# Allegro board 08_047456d.brd
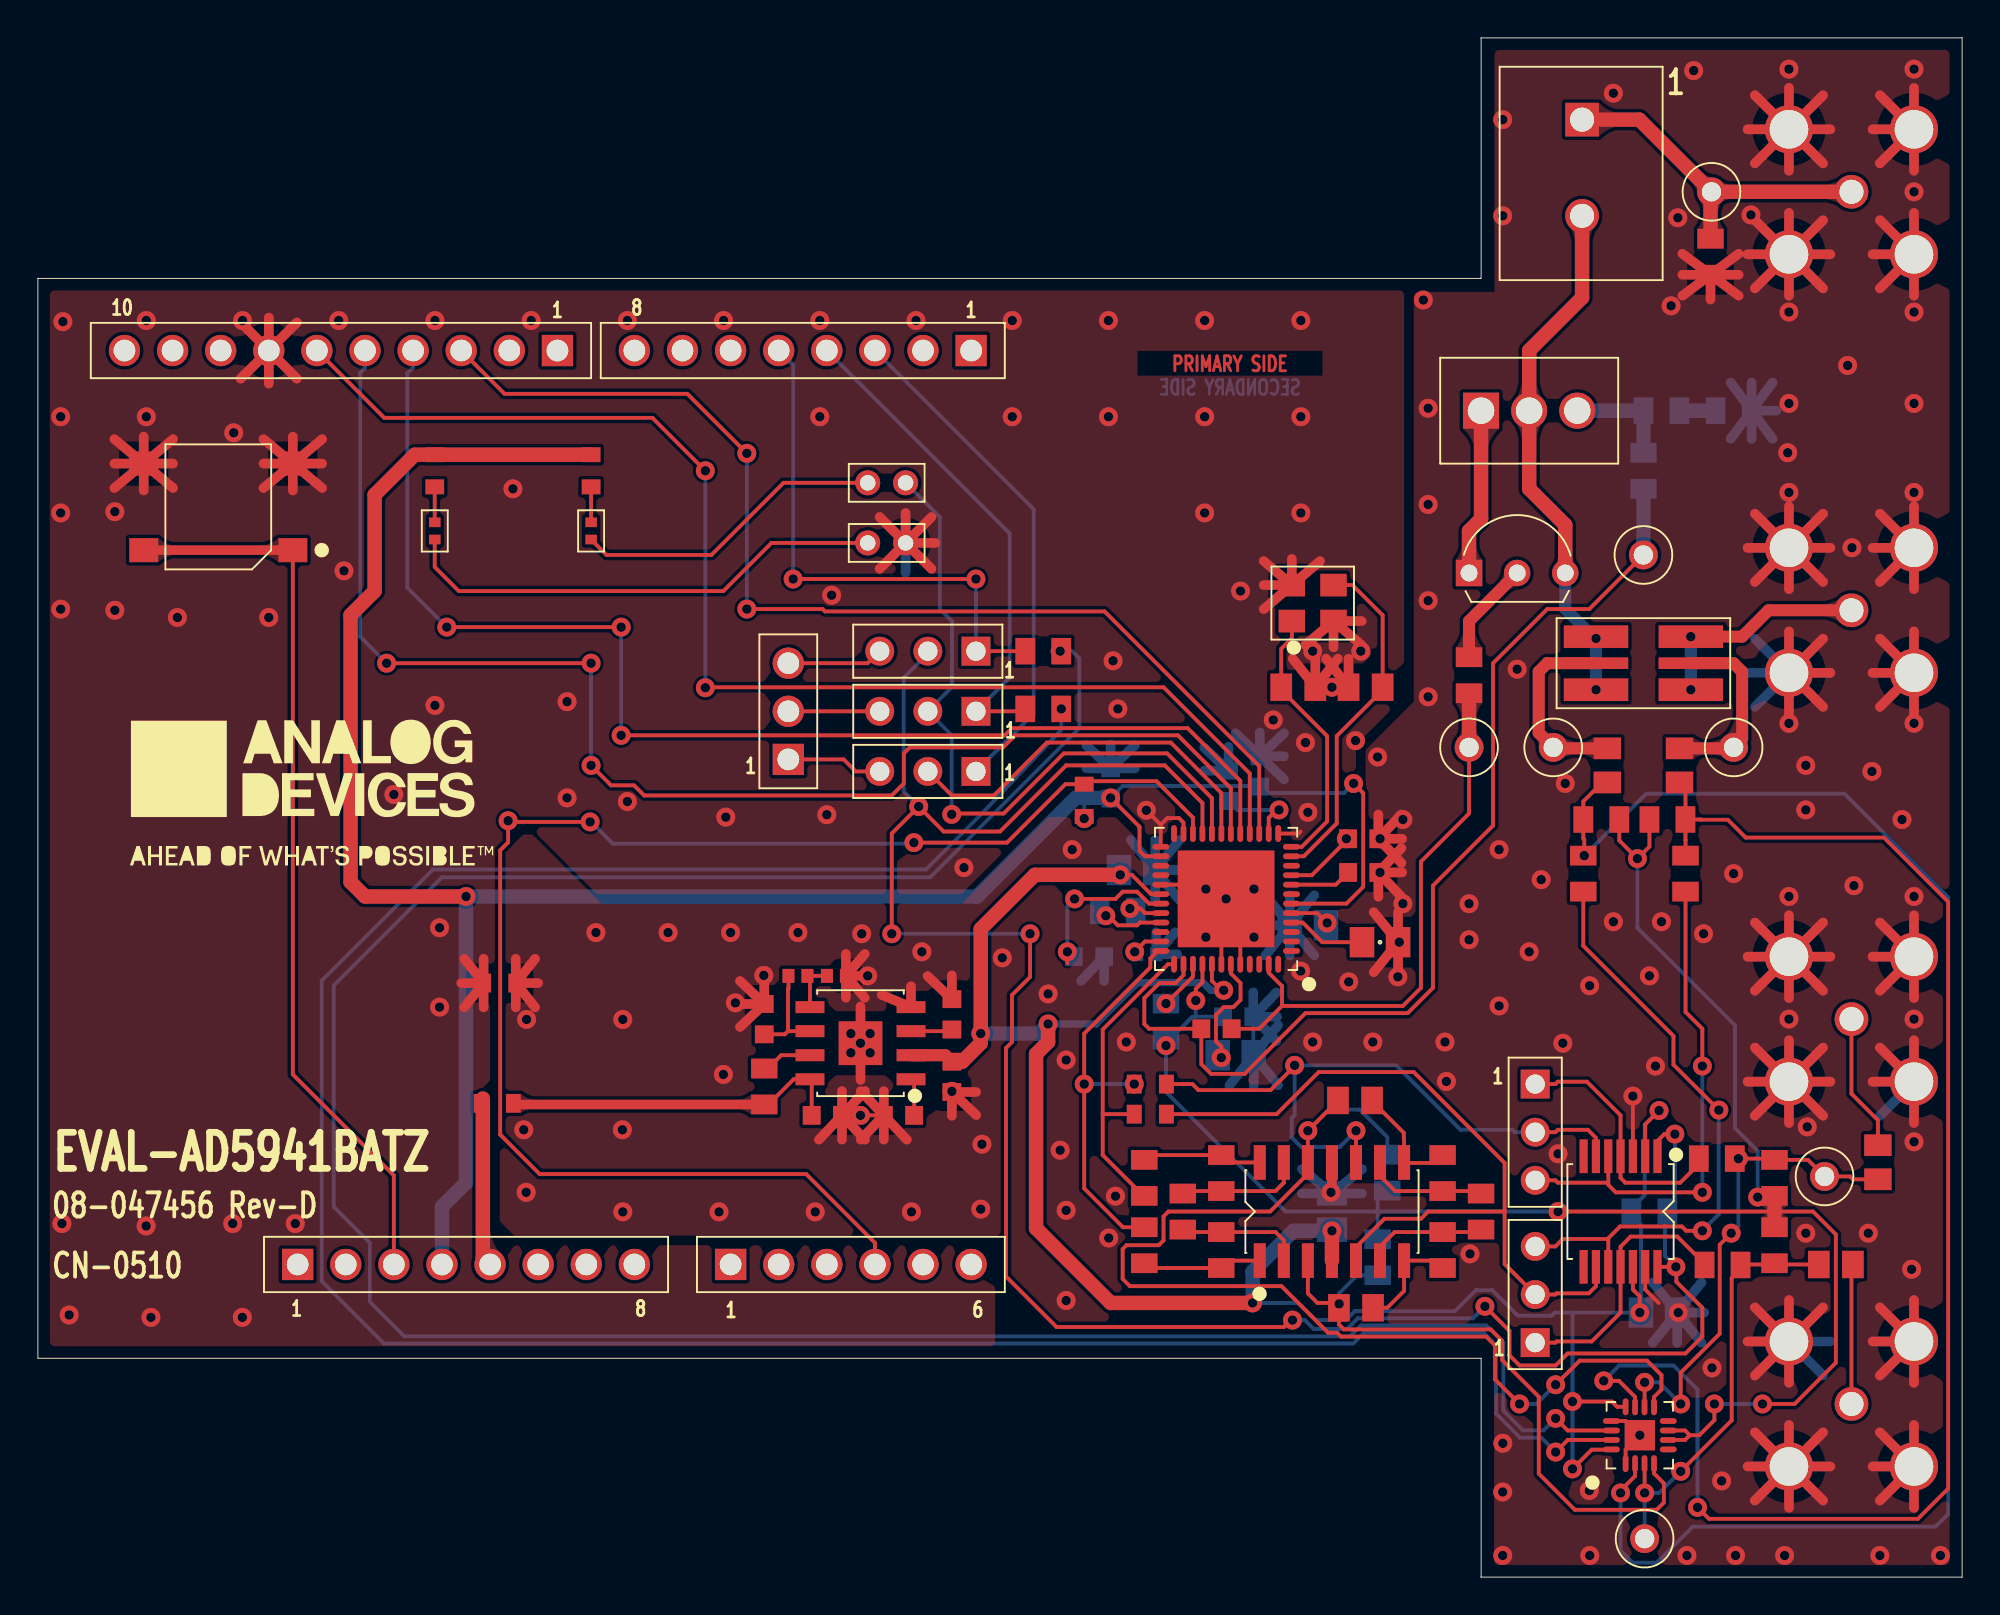
[diagram p0: board, top side]
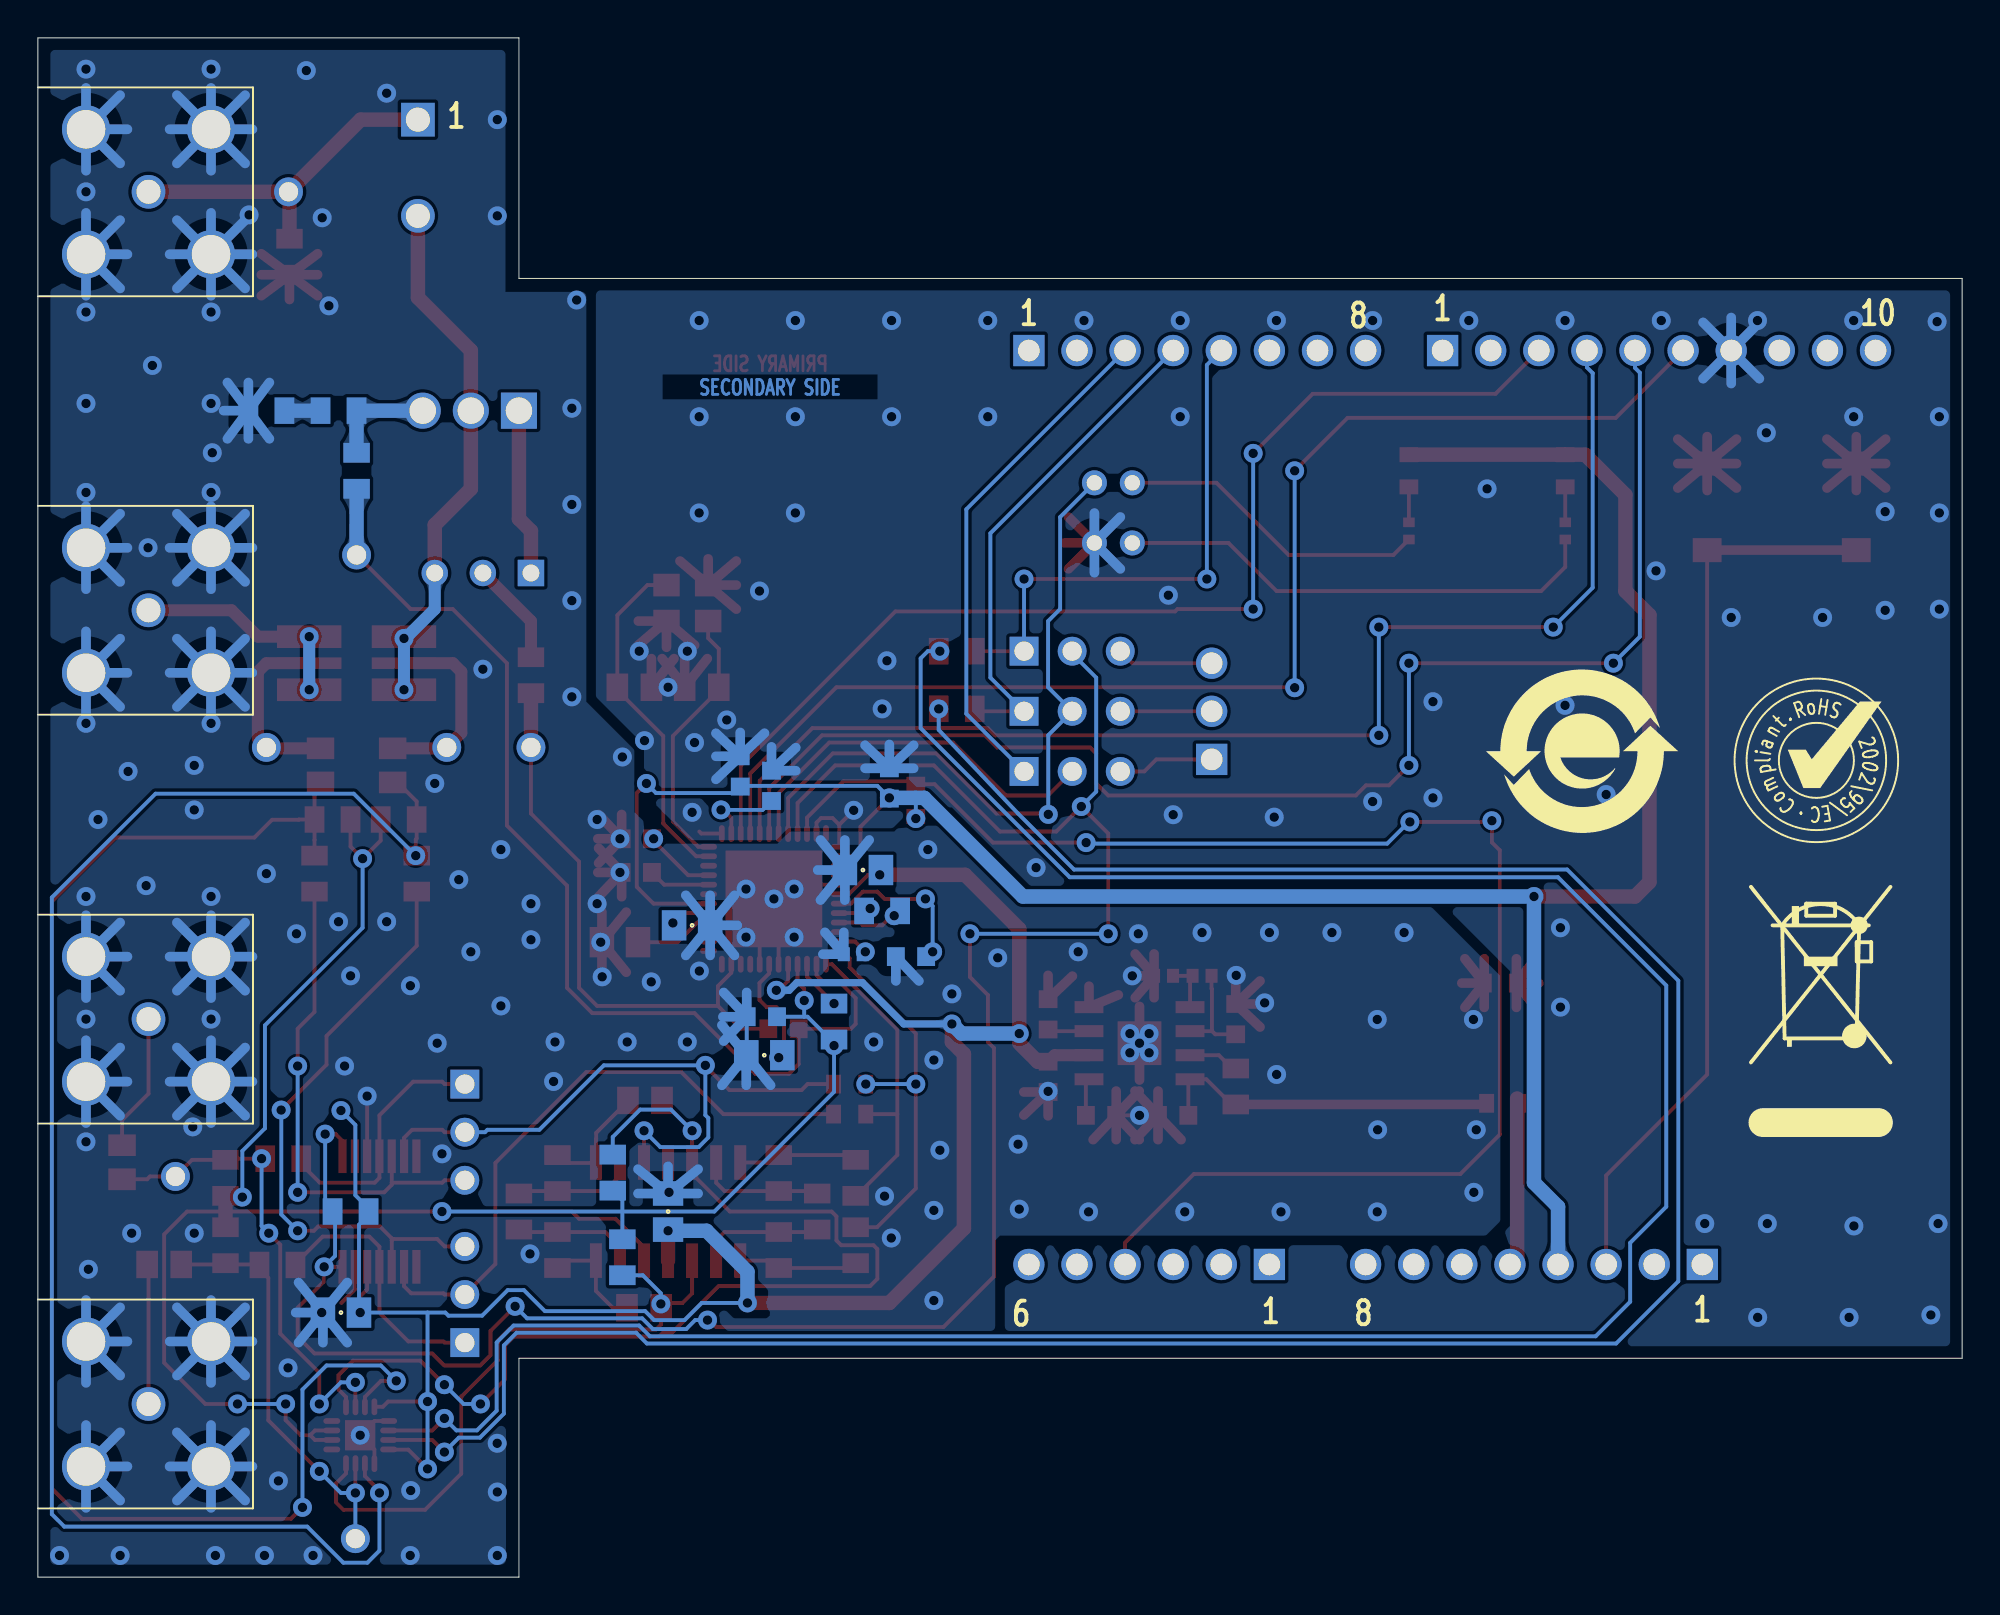
[diagram p1: board, bottom side, seen from below]

Outline 101.6 x 81.28 mm; copper layers: TOP, BOTTOM. Coordinates in mm from the lower left corner of the outline.
Outline path: 0,68.58 0,11.56 76.2,11.56 76.2,0 101.6,0 101.6,81.28 76.2,81.28 76.2,68.58 0,68.58

## Design rules (mm)
constraint set DEFAULT: min track width 0.203

## Placement (name value [footprint] x y rotation side)
A2  AD8694ARZ  [SO14NB-2]  68.33 19.3 0 top
AIN1  YEL  [CNKEY5001TP]  84.77 53.97 0 top
C5  2.2uF  [C0805]  69.6 14.22 180 top
C6  2.2uF  [C0805]  69.55 25.17 180 top
C7  10uF  [C0805H60]  68.33 19.3 90 bottom
C8  100PF  [C0603]  62.23 28.96 0 top
C9  1UF  [C0603]  63.37 29.59 180 bottom
C10  1UF  [C0603]  55.5 32.77 180 bottom
C11  1UF  [C0603]  69.98 38.99 180 top
C12  10uF  [C0805H60]  63.25 27.56 0 bottom
C13  1UF  [C0603]  69.98 37.21 180 top
C14  10uF  [C0805H60]  70.87 33.53 0 top
C15  10uF  [C0805H60]  85.6 13.97 0 bottom
C16  10uF  [C0805H60]  58.04 37.34 0 bottom
C17  10uF  [C0805H60]  67.06 34.42 0 bottom
C20  1UF  [C0603]  62.87 41.78 90 bottom
C21  6.8pF  [C0805]  66.55 46.99 0 top
C22  6.8pF  [C0805]  70.1 46.99 180 top
C25  10UF  [C0603]  41.66 24.38 0 top
C26  1UF  [C0603]  48.26 29.72 90 top
C27  10UF  [C0603]  45.47 24.38 180 top
C28  1UF  [C0603]  38.35 29.46 90 top
C29  10UF  [C0603]  48.26 26.42 270 top
C30  1UF  [C0603]  56.64 41.91 270 bottom
C32  1UF  [C0603]  64.52 42.55 270 bottom
C36  2.2uF  [C0805]  97.16 21.91 270 top
C37  2.2uF  [C0805]  82.87 42.86 270 top
C38  2.2uF  [C0805]  86.68 42.86 270 top
C39  2.2uF  [C0805]  94.93 16.51 180 top
CE0  YEL  [CNKEY5001TP]  75.56 43.81 0 top
EXC_P  YEL  [CNKEY5001TP]  80.01 43.81 0 top
F+  112809-75  [CNBNCRAL1098W550H474]  95.76 51.05 0 bottom
F-  112809-75  [CNBNCRAL1098W550H474]  95.76 73.15 0 bottom
GP1  SML-P11VTT86  [LED0402]  29.21 55.25 90 top
JP1  22-03-2031  [CNHDR1X3H530]  79.06 26.04 270 top
JP2  22-03-2031  [CNHDR1X3H530]  79.06 12.38 90 top
JP3  0  [R0805]  59.56 29.34 90 bottom
JP7  22-03-2031  [CNHDR1X3H530]  49.53 42.55 180 top
JP8  22-03-2031  [CNHDR1X3H530]  49.53 45.72 180 top
JP9  22-03-2031  [CNHDR1X3H530]  49.53 48.89 180 top
NOREF  -  []  13.72 16.51 0 top
NOREF#2  -  []  101.6 0 0 top
NOREF#3  -  []  0 11.56 0 top
NOREF#4  -  []  76.2 0 0 top
NOREF#5  -  []  0 11.56 0 top
NOREF#6  -  []  0 68.58 0 top
NOREF#7  -  []  0 68.58 0 top
NOREF#8  -  []  0 11.56 0 top
NOREF#9  -  []  126.36 122.56 0 top
NOREF#10  -  []  -2.54 294.64 0 top
NOREF#11  -  []  23.5 360.68 0 top
NOREF#12  -  []  101.6 0 90 top
NOREF#13  -  []  131.44 31.75 0 top
NOREF#14  -  []  101.6 81.28 180 top
NOREF#15  -  []  49.17 96.62 0 top
NOREF#16  -  []  135.2 -6.35 0 top
NOREF#17  -  []  135.15 16.51 0 top
NOREF#18  -  []  101.6 0 90 top
NOREF#19  -  []  76.2 0 0 top
NOREF#20  -  []  13.72 16.51 0 top
NOREF#21  -  []  0 68.58 270 top
NOREF#22  -  []  14.48 41.4 0 top
NOREF#23  -  []  -48.9 -43.18 0 top
NOREF#24  -  []  76.2 81.28 270 top
NOREF#25  -  []  20.07 43.61 180 bottom
NOREF#26  -  []  -1.8 40.13 180 bottom
NOREF#27  -  []  7.7 43.13 180 bottom
P1  M22-2010205  [CNHDR1X2H207]  43.81 54.61 0 top
P2  SSQ-106-03-G-S  [CNSAMTECSSQ-106-XX-X-S]  36.58 16.51 0 top
P3  SSQ-108-03-G-S  [CNSAMTECSSQ-108-XX-X-S]  13.72 16.51 0 top
P4  M20-9990345  [CNHDR1X3H340]  39.62 43.18 90 top
P5  SSQ-110-03-G-S  [CNSAMTECSSQ-110-XX-X-S]  27.43 64.77 180 top
P6  SSQ-108-03-G-S  [CNSAMTECSSQ-108-XX-X-S]  49.28 64.77 180 top
P7  EDZ250/2  [CNTH1X2H394]  81.53 76.96 270 top
P8  M22-2010205  [CNHDR1X2H207]  43.81 57.78 0 top
PWR  SML-P11MTT86RR  [LED0402]  20.95 55.25 90 top
Q1  2N3904TF  [TO92V2]  75.56 53.02 0 top
Q2  TIP31BG  [TO220]  78.74 61.59 0 top
R1  560  [R0603]  20.95 58.42 270 top
R2  2MEG  [R0805]  91.69 17.53 90 top
R3  2MEG  [R0805]  91.69 21.08 90 top
R4  2MEG  [R0805]  82.55 40 0 top
R5  2MEG  [R0805]  86.04 40 0 top
R6  1K  [R0805]  81.6 37.15 270 top
R7  1K  [R0805]  87 37.15 270 top
R8  1K  [R0805]  88.95 16.48 180 top
R9  1K  [R0805]  88.65 22.1 180 top
R10  10K  [R0805]  38.35 25.91 90 top
R11  10K  [R0603]  55.24 41.02 270 top
R12  1K  [R0805]  76.2 19.3 90 top
R13  10K  [R0805]  74.17 17.27 270 top
R14  10K  [R0805]  74.17 21.34 90 top
R15  17.4K  [R0402]  40.13 31.75 0 top
R16  10K  [R0402]  42.16 31.75 0 top
R17  0  [R0805]  58.42 17.53 90 top
R18  2MEG  [R0805]  70.74 16.89 90 bottom
R19  2MEG  [R0805]  71.25 21.36 90 bottom
R20  0  [R0805]  58.42 21.08 270 top
R21  62  [R0805]  85.72 61.59 0 bottom
R22  0  [R0805]  89.53 61.59 0 bottom
R25  51  [R0805]  75.56 47.62 270 top
R26  470  [R0805]  84.77 58.42 270 bottom
R27  1K  [R0805]  60.45 19.3 90 top
R28  10K  [R0805]  62.48 17.27 270 top
R29  10K  [R0805]  62.48 21.34 90 top
R32  0  [R0805]  88.32 69.72 270 top
R33  10K  [R0805]  85.09 19.3 0 bottom
R34  0  [R0402]  58.55 32.89 180 bottom
R35  0  [R0603]  58.74 24.45 180 top
R36  1K  [R0805]  57.02 35.18 0 bottom
R37  0  [R0603]  58.74 26.04 180 top
R38  0  [R0805]  53.09 45.85 0 top
R39  0  [R0805]  53.09 48.89 0 top
R40  0  [R0603]  24.26 25.02 180 top
R41  0  [R0603]  24.38 31.37 180 top
R42  560  [R0603]  29.21 58.42 270 top
RCAL  0.005  [R2512_6P_RSENSE]  84.77 48.26 180 top
RESET  B3S-1000  [SWB3S1000]  9.53 56.52 0 top
S+  112809-75  [CNBNCRAL1098W550H474]  95.76 9.14 0 bottom
S-  112809-75  [CNBNCRAL1098W550H474]  95.76 29.46 0 bottom
SNS_N  YEL  [CNKEY5001TP]  94.34 21.16 0 top
SNS_P  YEL  [CNKEY5001TP]  84.84 2.03 0 top
TP1  YEL  [CNKEY5001TP]  89.53 43.81 0 top
TP3  YEL  [CNKEY5001TP]  88.37 73.15 0 top
U1  AD5941BCPZ  [QFN48_7X7_PAD5_1X5_1]  62.74 35.81 90 top
U2  ADG636YRUZ  [TSSOP14]  83.57 19.3 180 top
U3  ADM7155ARDZ-04  [SO8NB-PAD2_3X2_3]  43.43 28.19 90 top
U4  ADG1609BCPZ  [QFN16_3X3_PAD1_6X1_6]  84.58 7.49 0 top
Y1  16MEGHZ  [YSML126W98H31]  67.31 51.44 0 top

## Library data of the parts
A2 = AD8694_V2: Tolerance: N/A; User Part Number: UPN; alternate symbols: (); part number: AD8694_V2_SM-AD8694ARZ,E017939,SO14NB-2; tolerance: N/A
AIN1 CE0 EXC_P SNS_N SNS_P TP1 TP3 = CNTP1P: Tolerance: N/A; User Part Number: UPN; alternate symbols: (); part number: CNTP1P_TH-YEL,E016321,CNKEY5001TP; tolerance: N/A
C5 C6 C36-C39 = CAP: User Part Number: UPN; Tolerance: 10; alternate symbols: (); part number: CAP_SM-2.2UF,10V,10,E010425,C0805; tolerance: 10
C7 C12 C14-C17 = CAP: Tolerance: 10; User Part Number: UPN; alternate symbols: (); part number: CAP_SM-10UF,25V,10,E014704,C0805H60; tolerance: 10
C8 = CAP: User Part Number: UPN; Tolerance: 5; alternate symbols: (); part number: CAP_SM-100PF,50V,5,E000415,C0603; tolerance: 5
C9-C11 C13 C20 C30 C32 = CAP: User Part Number: UPN; Tolerance: 10; alternate symbols: (); part number: CAP_SM-1UF,10V,10,E024444,C0603; tolerance: 10
C21 C22 = CAP: User Part Number: UPN; Tolerance: 0.25pF; alternate symbols: (); part number: CAP_SM-6.8PF,50V,0.25PF,E018426,C0805; tolerance: 0.25pF
C25 C27 C29 = CAP: User Part Number: UPN; Tolerance: 20; alternate symbols: (); part number: CAP_SM-10UF,35V,20,E026762,C0603; tolerance: 20
C26 C28 = CAP: User Part Number: UPN; Tolerance: 10; alternate symbols: (); part number: CAP_SM-1UF,25V,10,E025743,C0603; tolerance: 10
F+ F- S+ S- = CNBNC5P: User Part Number: UPN; Tolerance: N/A; alternate symbols: (); part number: CNBNC5P_TH-112809-75,E023533,CNBNCRAL1098W550H474; tolerance: N/A
GP1 = DIOLED: User Part Number: UPN; Tolerance: N/A; alternate symbols: (); part number: DIOLED_SM-SML-P11VTT86,N/A,N/A,E019415,LED0402; tolerance: N/A
JP1 JP2 JP7-JP9 = CN3P_JMPRSHRT: User Part Number: UPN; Tolerance: N/A; alternate symbols: (CNHDR1X3H530_ALT); part number: CN3P_JMPRSHRT_TH-22-03-2031,E021002,CNHDR1X3H530; tolerance: N/A
JP3 = RESJMPRSHRT: User Part Number: UPN; Tolerance: N/A; alternate symbols: (); part number: RESJMPRSHRT_SM-0,E028415,1/2W,N/A,R0805; tolerance: N/A
P1 P8 = CN2P: User Part Number: UPN; Tolerance: N/A; alternate symbols: (); part number: CN2P_TH-M22-2010205,E023091,CNHDR1X2H207; tolerance: N/A
P2 = CN6P: User Part Number: UPN; Tolerance: N/A; alternate symbols: (); part number: CN6P_TH-SSQ-106-03-G-S,E020477,CNSAMTECSSQ-106-XX-X-S; tolerance: N/A
P3 P6 = CN8P_A: User Part Number: UPN; Tolerance: N/A; alternate symbols: (); part number: CN8P_A_TH-SSQ-108-03-G-S,E020478,CNSAMTECSSQ-108-XX-X-S; tolerance: N/A
P4 = CN3P: Tolerance: N/A; User Part Number: UPN; alternate symbols: (); part number: CN3P_TH-M20-9990345,E017614,CNHDR1X3H340; tolerance: N/A
P5 = CN10P: User Part Number: UPN; Tolerance: N/A; alternate symbols: (); part number: CN10P_TH-SSQ-110-03-G-S,E020479,CNSAMTECSSQ-110-XX-X-S; tolerance: N/A
P7 = CN2P: User Part Number: UPN; Tolerance: N/A; alternate symbols: (); part number: CN2P_TH-EDZ250/2,E013453,CNTH1X2H394; tolerance: N/A
PWR = DIOLED: User Part Number: UPN; Tolerance: N/A; alternate symbols: (); part number: DIOLED_SM-SML-P11MTT86R,N/A,N/A,E014445,LED0402; tolerance: N/A
Q1 = TRAN2N3904: User Part Number: UPN; Tolerance: N/A; alternate symbols: (); part number: TRAN2N3904_TH-2N3904TF,E017741,TO92V2; tolerance: N/A
Q2 = TRANTIP31B: User Part Number: UPN; Tolerance: N/A; alternate symbols: (); part number: TRANTIP31B_TH-TIP31BG,E005562,TO220; tolerance: N/A
R1 R42 = RES: User Part Number: UPN; Tolerance: 1; alternate symbols: (); part number: RES_SM-560,E004245,1/16W,1,R0603; tolerance: 1
R2-R5 R18 R19 = RES: User Part Number: UPN; Tolerance: 0.1; alternate symbols: (R0805L); part number: RES_SM-2MEG,E030617,1/10W,0.1,R0805; tolerance: 0.1
R6-R9 R36 = RES: User Part Number: UPN; Tolerance: 1; alternate symbols: (R0805L); part number: RES_SM-1K,E003415,1/8W,1,R0805; tolerance: 1
R10 R33 = RES: User Part Number: UPN; Tolerance: 1; alternate symbols: (R0805L); part number: RES_SM-10K,E003254,1/8W,1,R0805; tolerance: 1
R11 = RES: User Part Number: UPN; Tolerance: 1; alternate symbols: (R0603L); part number: RES_SM-10K,E017856,1/16W,1,R0603; tolerance: 1
R12 R27 = RES: User Part Number: UPN; Tolerance: 0.1; alternate symbols: (R0805_0603_TH200LD25); part number: RES_SM-1K,E003811,1/8W,0.1,R0805; tolerance: 0.1
R13 R14 R28 R29 = RES: User Part Number: UPN; Tolerance: 0.1; alternate symbols: (R0805L); part number: RES_SM-10K,E003806,1/8W,0.1,R0805; tolerance: 0.1
R15 = RES: User Part Number: UPN; Tolerance: 1; alternate symbols: (R0402L); part number: RES_SM-17.4K,E014042,1/16W,1,R0402; tolerance: 1
R16 = RES: User Part Number: UPN; Tolerance: 5; alternate symbols: (); part number: RES_SM-10K,E019640,1/16W,5,R0402; tolerance: 5
R17 R20 R22 R32 R38 R39 = RES: User Part Number: UPN; Tolerance: N/A; alternate symbols: (R0805L); part number: RES_SM-0,E004152,1/10W,N/A,R0805; tolerance: N/A
R21 = RES: User Part Number: UPN; Tolerance: 5; alternate symbols: (R0805L); part number: RES_SM-62,E004198,1/10W,5,R0805; tolerance: 5
R25 = RES: User Part Number: UPN; Tolerance: 1; alternate symbols: (R0805L); part number: RES_SM-51,E014707,1/8W,1,R0805; tolerance: 1
R26 = RES: User Part Number: UPN; Tolerance: 1; alternate symbols: (R0805L); part number: RES_SM-470,E023447,1/3W,1,R0805; tolerance: 1
R34 = RES: User Part Number: UPN; Tolerance: 5; alternate symbols: (R0402L,R0402L_ALT); part number: RES_SM-0,E003438,N/A,5,R0402; tolerance: 5
R35 R37 R40 R41 = RES: User Part Number: UPN; Tolerance: 1; alternate symbols: (R0603L); part number: RES_SM-0,E004207,1/16W,1,R0603; tolerance: 1
RCAL = RES6P: User Part Number: UPN; Tolerance: 1; alternate symbols: (); part number: RES6P_SM-0.005,E025935,2W,1,R2512_6P_RSENSE; tolerance: 1
RESET = SWSPST4PIN: User Part Number: UPN; Tolerance: N/A; alternate symbols: (); part number: SWSPST4PIN_SM-B3S-1000,E004572,SWB3S1000; tolerance: N/A
U1 = AD5941: User Part Number: UPN; Tolerance: N/A; alternate symbols: (); part number: AD5941_SM-AD5941BCPZ,E027951,QFN48_7X7_PAD5_1X5_1; tolerance: N/A
U2 = ADG636: Tolerance: N/A; User Part Number: UPN; alternate symbols: (); part number: ADG636_SM-ADG636YRUZ,E011813,TSSOP14; tolerance: N/A
U3 = ADM7155: Tolerance: N/A; User Part Number: UPN; alternate symbols: (); part number: ADM7155_SM-ADM7155ARDZ-04-R7,E022406,SO8NB-PAD2_3X2_3; tolerance: N/A
U4 = ADG1609: User Part Number: UPN; Tolerance: N/A; alternate symbols: (); part number: ADG1609_SM-ADG1609BCPZ,E020447,QFN16_3X3_PAD1_6X1_6; tolerance: N/A
Y1 = XTAL4PIN_V3: Tolerance: 10PPM; User Part Number: UPN; alternate symbols: (); part number: XTAL4PIN_V3_SM-16MEGHZ,E029612,YSML126W98H31; tolerance: 10PPM

## Footprints (pads in the part's own frame, mm; a bottom-side part is the same pattern mirrored in y, then rotated)
C0603
  rect 0.94x0.991 smd: 1(-0.8,0) 2(0.8,0)
C0805
  rect 1.143x1.448 smd: 1(-0.9,0) 2(0.9,0)
C0805H60
  rect 1.295x1.6 smd: 1(-0.953,0) 2(0.953,0)
CNBNCRAL1098W550H474
  round 1.778 hole 1.27: 1(0,0)
  round 2.54 hole 2.032: 2(-3.3,-3.3) 3(3.3,-3.3) 4(3.3,3.3) 5(-3.3,3.3)
CNHDR1X2H207
  round 1.321 hole 0.813: 1(0,0) 2(2,0)
CNHDR1X3H340
  rect 1.651x1.651 hole 1.143: 1(0,0)
  round 1.651 hole 1.143: 2(2.54,0) 3(5.08,0)
CNHDR1X3H530
  rect 1.524x1.524 hole 1.016: 1(0,0)
  round 1.524 hole 1.016: 2(2.54,0) 3(5.08,0)
CNKEY5001TP
  round 1.524 hole 1.016: 1(0,0)
CNSAMTECSSQ-106-XX-X-S
  rect 1.651x1.651 hole 1.143: 1(0,0)
  round 1.651 hole 1.143: 2(2.54,0) 3(5.08,0) 4(7.62,0) 5(10.16,0) 6(12.7,0)
CNSAMTECSSQ-108-XX-X-S
  rect 1.651x1.651 hole 1.143: 1(0,0)
  round 1.651 hole 1.143: 2(2.54,0) 3(5.08,0) 4(7.62,0) 5(10.16,0) 6(12.7,0) 7(15.24,0) 8(17.78,0)
CNSAMTECSSQ-110-XX-X-S
  rect 1.651x1.651 hole 1.143: 1(0,0)
  round 1.651 hole 1.143: 2(2.54,0) 3(5.08,0) 4(7.62,0) 5(10.16,0) 6(12.7,0) 7(15.24,0) 8(17.78,0) 9(20.32,0) 10(22.86,0)
CNTH1X2H394
  rect 1.778x1.778 hole 1.27: 1(0,0)
  round 1.778 hole 1.27: 2(5.08,0)
LED0402
  rect 0.508x0.61 smd: A(0.454,0) C(-0.454,0)
QFN16_3X3_PAD1_6X1_6
  oval 0.305x0.889 smd: 1(-0.75,-1.5) 2(-0.25,-1.5) 3(0.25,-1.5) 4(0.75,-1.5) 9(0.75,1.5) 10(0.25,1.5) 11(-0.25,1.5) 12(-0.75,1.5)
  oval 0.889x0.305 smd: 5(1.5,-0.75) 6(1.5,-0.25) 7(1.5,0.25) 8(1.5,0.75) 13(-1.5,0.75) 14(-1.5,0.25) 15(-1.5,-0.25) 16(-1.5,-0.75)
  rect 1.6x1.6 smd: PAD(0,0)
QFN48_7X7_PAD5_1X5_1
  oval 0.305x0.889 smd: 1(-2.75,-3.45) 2(-2.25,-3.45) 3(-1.75,-3.45) 4(-1.25,-3.45) 5(-0.75,-3.45) 6(-0.25,-3.45) 7(0.25,-3.45) 8(0.75,-3.45) 9(1.25,-3.45) 10(1.75,-3.45) 11(2.25,-3.45) 12(2.75,-3.45) 25(2.75,3.45) 26(2.25,3.45) 27(1.75,3.45) 28(1.25,3.45) 29(0.75,3.45) 30(0.25,3.45) 31(-0.25,3.45) 32(-0.75,3.45) 33(-1.25,3.45) 34(-1.75,3.45) 35(-2.25,3.45) 36(-2.75,3.45)
  oval 0.889x0.305 smd: 13(3.45,-2.75) 14(3.45,-2.25) 15(3.45,-1.75) 16(3.45,-1.25) 17(3.45,-0.75) 18(3.45,-0.25) 19(3.45,0.25) 20(3.45,0.75) 21(3.45,1.25) 22(3.45,1.75) 23(3.45,2.25) 24(3.45,2.75) 37(-3.45,2.75) 38(-3.45,2.25) 39(-3.45,1.75) 40(-3.45,1.25) 41(-3.45,0.75) 42(-3.45,0.25) 43(-3.45,-0.25) 44(-3.45,-0.75) 45(-3.45,-1.25) 46(-3.45,-1.75) 47(-3.45,-2.25) 48(-3.45,-2.75)
  rect 5.105x5.105 smd: PAD(0,0)
R0402
  rect 0.635x0.737 smd: 1(-0.5,0) 2(0.5,0)
R0603
  rect 0.787x0.991 smd: 1(-0.85,0) 2(0.85,0)
R0805
  rect 1.041x1.397 smd: 1(-0.95,0) 2(0.95,0)
R2512_6P_RSENSE
  rect 3.404x1.194 smd: 1(-2.502,1.402) 3(-2.502,-1.402) 4(2.502,-1.402) 6(2.502,1.402)
  rect 3.404x0.61 smd: 2(-2.501,0) 5(2.503,0)
SO8NB-PAD2_3X2_3
  rect 0.635x1.524 smd: 1(-1.905,-2.667) 2(-0.635,-2.667) 3(0.635,-2.667) 4(1.905,-2.667) 5(1.905,2.667) 6(0.635,2.667) 7(-0.635,2.667) 8(-1.905,2.667)
  rect 2.311x2.311 smd: PAD(0,0)
SO14NB-2
  rect 0.635x1.829 smd: 1(-3.81,-2.591) 2(-2.54,-2.591) 3(-1.27,-2.591) 4(0,-2.591) 5(1.27,-2.591) 6(2.54,-2.591) 7(3.81,-2.591) 8(3.81,2.591) 9(2.54,2.591) 10(1.27,2.591) 11(0,2.591) 12(-1.27,2.591) 13(-2.54,2.591) 14(-3.81,2.591)
SWB3S1000
  rect 1.524x1.27 smd: 1(3.937,-2.286) 2(-3.937,-2.286) 3(3.937,2.286) 4(-3.937,2.286)
TO92V2
  rect 1.397x1.397 hole 0.889: 1(0,0)
  round 1.397 hole 0.889: 2(2.54,0) 3(5.08,0)
TO220
  rect 1.905x1.905 hole 1.397: 1(-2.54,0)
  round 1.905 hole 1.397: 2(0,0) 3(2.54,0)
TSSOP14
  rect 0.432x1.778 smd: 1(-1.95,-2.92) 2(-1.3,-2.92) 3(-0.65,-2.92) 4(0,-2.92) 5(0.65,-2.92) 6(1.3,-2.92) 7(1.95,-2.92) 8(1.95,2.92) 9(1.3,2.92) 10(0.65,2.92) 11(0,2.92) 12(-0.65,2.92) 13(-1.3,2.92) 14(-1.95,2.92)
YSML126W98H31
  rect 1.397x1.194 smd: 1(-1.1,-0.95) 2(1.1,-0.95) 3(1.1,0.95) 4(-1.1,0.95)

## Nets
A3.3V: A2.4 C7.1 C15.1 C16.1 C29.1 R33.1 U1.30 U1.41 U2.2 U2.12 U3.2 U4.12 U4.16
A5V: C25.1 R10.1 R40.1 U3.8
AGND: A2.11(V-) C7.2(N2) C9.1 C10.1 C11.1 C12.2(N2) C13.1 C14.2(N2) C15.2(N2) C16.2(N2) C17.1 C25.2(N2) C26.2(N2) C27.2(N2) C28.2(N2) C29.2(N2) F+.2 F+.3 F+.4 F+.5(SH4) F-.2 F-.3 F-.4 F-.5(SH4) R16.2(N2) R22.2(N2) R32.2(N2) R34.1 R41.1 S+.2 S+.3 S+.4 S+.5(SH4) S-.2 S-.3 S-.4 S-.5(SH4) U1.29 U1.42 U1.44 U1.PAD U2.3(VSS) U2.13 U3.4 U3.PAD U4.1(VSS) U4.13 U4.PAD
D3.3V: C30.2(N2) C32.2(N2) P3.4 R1.1 R11.2(N2) R42.1 U1.6 U1.26
D5V: P3.5 R40.2(N2)
DGND: C20.2(N2) C21.2(N2) C22.2(N2) C30.1 C32.1 P1.2(N2) P5.7 R41.2(N2) RESET.3(N5) RESET.4 U1.13 U1.23 U1.25 Y1.2 Y1.4
A0: P2.1
A1: P2.2
A2: P2.3
A3: P2.4 R11.1 U1.22
A4: P2.5
A5: P2.6(N6)
AFE1: U1.34
AFE2: R34.2(N2) U1.35
AFE3: U1.27
AFE4: U1.28
AIN1: AIN1.1(N1) C8.1 R26.2(N2) U1.38
AIN2: R20.2(N2) R35.2(N2) U1.37
AIN3: R17.2(N2) R37.2(N2) U1.36
AMPIN_N: A2.10 JP1.2 R37.1 U2.6
AMPIN_P: A2.5 JP2.2 R35.1 U2.9
AREF: P5.8
CE0: C8.2(N2) CE0.1(N1) R25.2(N2) U1.47
D0: P6.1
D1: P6.2
D2: JP7.1 P6.3
D3: JP8.1 P6.4 R38.1
D4: JP9.1 P6.5 R39.1
D5: P6.6
D6: P6.7
D7: P6.8(N8)
D8: P5.1
D9: P5.2
D10: P5.3 U1.15
D11: P5.4 U1.17
D12: P5.5 U1.18
D13: P5.6 U1.16
DE0: U1.46
EXC_P: P7.2(N2) Q1.3 Q2.2 RCAL.4 RCAL.6(N6)
GPIO0: JP7.2 U1.19
GPIO1: JP8.2 P8.2(N2) U1.20
GPIO2: JP9.2 R33.2(N2) U1.21 U2.1 U2.14
LPF0: C9.2(N2) JP3.1 R2.2(N2) R3.1 R4.2(N2) R5.1 R18.2(N2) R19.1 U1.40 U4.6 U4.7
PRE1A: C37.2(N2) R4.1 R6.1 U4.2
PRE1B: C38.2(N2) R5.2(N2) R7.1 U4.11
PRE2A: C39.2(N2) R2.1 R8.1 SNS_P.1(N1) U4.3
PRE2B: C36.2(N2) R3.2(N2) R9.1 SNS_N.1(N1) U4.10
PRE3A: A2.3 C5.2(N2) R18.1 U4.4
PRE3B: A2.12 C6.2(N2) R19.2(N2) U4.9
RE0: U1.48
RESET_SHIELD: P3.3 RESET.1 RESET.2
RREF_N: JP1.3(S3) R7.2(N2) U2.5
RREF_P: JP2.3(S3) R6.2(N2) U2.10
SCL: P5.10
SDA: P5.9(N9)
SENSE_N: JP1.1 R9.2(N2) U2.4
SENSE_P: JP2.1 R8.2(N2) U2.11
UNNAMED_2_AD5941_I433_AIN0: JP3.2(S2) U1.39
UNNAMED_2_AD5941_I433_AVDDREG: C17.2(N2) U1.5
UNNAMED_2_AD5941_I433_DVDDREG1V: C20.1 U1.14
UNNAMED_2_AD5941_I433_RCAL0: R36.2(N2) U1.32
UNNAMED_2_AD5941_I433_RCAL1: R36.1 U1.33
UNNAMED_2_AD5941_I433_VBIAS0: C13.2(N2) U1.8
UNNAMED_2_AD5941_I433_VREF1V82: C12.1 U1.43
UNNAMED_2_AD5941_I433_XTALI: C22.1 U1.11 Y1.3(N2)
UNNAMED_2_AD5941_I433_XTALO: C21.1 U1.12(XTALO) Y1.1
UNNAMED_2_AD8694V2_I345_: A2.2 R27.1 R28.1
UNNAMED_2_AD8694V2_I345_OUT: A2.1 R17.1 R28.2(N2)
UNNAMED_2_AD8694V2_I349_: A2.13 R27.2(N2) R29.1
UNNAMED_2_AD8694V2_I349_OUT: A2.14 R20.1 R29.2(N2)
UNNAMED_2_AD8694V2_I379_: A2.6 R12.1 R13.1
UNNAMED_2_AD8694V2_I379_OUT: A2.7 C5.1 R13.2(N2)
UNNAMED_2_AD8694V2_I385_: A2.9 R12.2(N2) R14.1
UNNAMED_2_AD8694V2_I385_OUT: A2.8 C6.1 R14.2(N2)
UNNAMED_2_ADG1609_I415_A0: R38.2(N2) U4.15
UNNAMED_2_ADG1609_I415_A1: R39.2(N2) U4.14
UNNAMED_2_ADM7155_I224_BYP: C26.1 U3.3
UNNAMED_2_ADM7155_I224_EN: R10.2(N2) U3.7
UNNAMED_2_ADM7155_I224_REF: C28.1 R15.1 U3.6
UNNAMED_2_ADM7155_I224_REFSENSE: R15.2(N2) R16.1 U3.5
UNNAMED_2_ADM7155_I224_VREG: C27.1 U3.1(VREG)
UNNAMED_2_CAP_I316_N1: C37.1 EXC_P.1(N1) RCAL.5
UNNAMED_2_CAP_I317_N1: C38.1 RCAL.2 TP1.1(N1)
UNNAMED_2_CAP_I357_N1: C39.1 S+.1
UNNAMED_2_CAP_I362_N1: C36.1 S-.1
UNNAMED_2_CN2P_I372_N1: F-.1 P7.1 R32.1 TP3.1(N1)
UNNAMED_2_CN2P_I422_N1: GP1.C P8.1
UNNAMED_2_CN2P_I430_N1: P1.1 PWR.C
UNNAMED_2_CN3P_I243_N1: JP7.3(S3) P4.1
UNNAMED_2_CN3P_I243_N2: JP8.3(S3) P4.2
UNNAMED_2_CN3P_I243_N3: JP9.3(S3) P4.3(N3)
UNNAMED_2_CNBNC5P_I321_CNTR: F+.1 RCAL.1 RCAL.3
UNNAMED_2_DIOLED_I421_P: PWR.A(P) R1.2(N2)
UNNAMED_2_DIOLED_I424_P: GP1.A(P) R42.2(N2)
UNNAMED_2_RES_I303_N1: Q1.2 R25.1
UNNAMED_2_RES_I307_N1: Q2.3(E) R21.1 R26.1
UNNAMED_2_RES_I309_N2: R21.2(N2) R22.1
UNNAMED_2_TRAN2N3904_I306_E: Q1.1(E) Q2.1
VBIAS_CAP: C10.2(N2) U1.31
VREF_2V5: C14.1 U1.4
VZERO0: C11.2(N2) U1.9

Pads without a net: P3 1 2 6 7 8; U1 1 2 3 7 10 24 45; U2 7 8; U4 5 8

## Via types
v1: diameter 1, hole 0.5, TOP to BOTTOM, 275 vias

## Routing (per net, layer and track width the routed paths; a pad name or vN(x,y) marks a point on that pad's centre or on a via; arc(x,y) is an arc through that point)
A3.3V: length 122.5
  TOP w0.203: U2.12 84.22,15.19 84.28,15.13 84.58,14.83 v1(84.58,13.97) ; U2.2 84.87,23.91 v1(85.6,24.64) ; U4.16 83.07,6.73 82.04,6.73 v1(81.03,5.71) ; U1.30 58.78,36.06 57.76,37.08 v1(57.15,37.08) ; U4.12 83.39,8.99 83.11,9.27 v1(81.03,9.27) ; v1(62.61,30.99) 62.48,30.99 61.99,31.48 U1.41 ; v1(49.78,28.7) 49.78,28.19
  TOP w0.635: U3.2 47.92,27.56 C29.1
  TOP w0.762: v1(53.34,29.21) 53.34,28.26 52.7,27.62 52.7,18.41 56.64,14.48 v1(64.14,14.48) ; A2.4 v1(68.33,18.29) ; v1(49.78,28.7) 49.78,34.23 52.64,37.08 v1(57.15,37.08) ; 49.78,28.19 48.81,27.22 C29.1
  BOTTOM w0.203: C16.1 57.09,37.15 v1(57.15,37.08) ; v1(64.14,14.48) 66.55,14.48 67.45,13.57 69.06,13.57 69.54,14.05 74.83,14.05 75.94,15.16 76.79,15.16 78.14,13.8 79.92,13.8 80.09,13.97 81.03,13.97 ; v1(81.03,5.71) v1(81.03,9.27) 81.03,13.97 ; C15.1 84.65,18.61 84.14,19.11 R33.1 84.14,19.47 84.84,20.17 84.84,23.88 v1(85.6,24.64) ; 81.03,13.97 v1(84.58,13.97) ; v1(68.33,18.29) C7.1
  BOTTOM w0.381: v1(62.61,30.99) 61.93,30.99 61.53,31.39 58.06,31.39 55.88,29.21 v1(53.34,29.21)
  BOTTOM w0.762: v1(53.34,29.21) 52.83,28.7 v1(49.78,28.7) ; v1(64.14,14.48) 64.14,16.13 66.29,18.29 v1(68.33,18.29)
A5V: length 18.2
  TOP w0.203: C25.1 40.86,26.2 40.77,26.29 39.9,26.29 38.57,24.96 R10.1
  TOP w0.508: R40.1 25.17,24.96 R10.1
AGND: length 658.8
  TOP w0.203: U1.42 62.49,33.4 62.74,33.65 v1(62.74,35.81) ; U1.29 60.58,36.56 60.81,36.33 v1(61.67,36.33) 62.19,35.81 v1(62.74,35.81) ; C14.2 v1(71.88,33.53) ; C29.2 v1(48.26,25.65) ; U4.1 83.83,6.74 v1(84.58,7.49) 83.83,8.24 U4.13 ; v1(62.74,35.81) 63.49,35.06 U1.44 ; U2.13 84.87,15.19 85.58,14.48 ; C27.2 v1(43.43,24.38) C25.2 ; U2.3 v1(84.22,25.4)
  TOP w0.508: 90.27,5.84 S+.5 ; S+.5 94.26,7.64 ; S+.5 92.46,8.03 ; S+.5 92.46,3.66 ; S+.5 90.66,4.04 ; S+.5 94.64,5.84 ; S+.5 94.26,4.04 ; S+.5 90.66,7.64 ; C11.1 71.99,40.27 ; C11.1 70.78,40.27 ; C11.1 72.03,38.99 ; C11.1 71.99,37.71 ; S+.3 99.06,14.63 ; S+.3 97.26,10.64 ; S+.3 99.06,10.26 ; S+.3 97.26,14.24 ; S+.3 96.87,12.44 ; 44.67,23.1 C27.2 ; C27.2 45.88,23.1 ; C27.2 43.45,25.67 ; C27.2 44.67,25.67 ; C27.2 43.45,23.1 ; 90.66,27.96 S-.5 ; S-.5 94.26,27.96 ; S-.5 90.66,24.36 ; S-.5 94.64,26.16 ; S-.5 90.27,26.16 ; S-.5 92.46,23.98 ; S-.5 94.26,24.36 ; S-.5 92.46,28.35 ; 96.87,5.84 S+.4 ; S+.4 97.26,4.04 ; S+.4 97.26,7.64 ; S+.4 99.06,8.03 ; S+.4 99.06,3.66 ; 90.66,56.15 F+.2 ; F+.2 94.64,54.35 ; F+.2 92.46,56.54 ; F+.2 94.26,56.15 ; F+.2 94.26,52.55 ; F+.2 90.27,54.35 ; F+.2 90.66,52.55 ; F+.2 92.46,52.17 ; 97.26,56.15 F+.3 ; F+.3 99.06,56.54 ; F+.3 99.06,52.17 ; F+.3 96.87,54.35 ; F+.3 97.26,52.55 ; 86.83,68.77 R32.2 ; R32.2 89.8,68.77 ; R32.2 86.83,69.88 ; R32.2 89.8,67.66 ; R32.2 89.8,69.88 ; R32.2 88.32,67.46 ; R32.2 86.83,67.66 ; 42.66,30.59 R16.2 ; R16.2 42.66,32.91 ; R16.2 43.66,30.59 ; R16.2 43.66,32.91 ; R16.2 43.77,31.75 ; 90.66,14.24 S+.2 ; S+.2 90.66,10.64 ; S+.2 94.26,14.24 ; S+.2 92.46,14.63 ; S+.2 92.46,10.26 ; S+.2 90.27,12.44 ; 99.06,30.58 S-.3 ; S-.3 99.06,34.95 ; S-.3 97.26,34.56 ; S-.3 97.26,30.96 ; S-.3 96.87,32.76 ; F+.5 92.46,49.94 ; F+.5 92.46,45.57 ; F+.5 94.26,49.55 ; F+.5 94.64,47.75 ; F+.5 94.26,45.95 ; R41.1 26.42,31.37 ; R41.1 25.23,32.65 ; R41.1 25.23,30.09 ; R41.1 26.25,30.09 ; R41.1 26.25,32.65 ; 92.46,74.27 F-.2 ; F-.2 90.66,78.25 ; F-.2 94.64,76.45 ; F-.2 92.46,78.64 ; F-.2 94.26,74.65 ; F-.2 90.27,76.45 ; F-.2 94.26,78.25 ; F-.2 90.66,74.65 ; F-.4 99.06,72.04 ; F-.4 97.26,71.65 ; F-.4 96.87,69.85 ; F-.4 97.26,68.05 ; F-.4 99.06,67.67 ; 90.27,32.76 S-.2 ; S-.2 90.66,30.96 ; S-.2 94.26,30.96 ; S-.2 90.66,34.56 ; S-.2 92.46,30.58 ; S-.2 92.46,34.95 ; S-.2 94.26,34.56 ; S-.2 94.64,32.76 ; C25.2 43.67,25.67 ; C25.2 41.24,23.1 ; C25.2 43.67,23.1 ; C25.2 42.46,23.1 ; C25.2 42.46,25.67 ; A2.11 68.33,20.37 v1(68.28,20.32) ; S-.4 99.06,28.35 ; S-.4 96.87,26.16 ; S-.4 99.06,23.98 ; S-.4 97.26,27.96 ; C29.2 49.54,24.4 ; C29.2 48.26,24.36 ; C29.2 49.54,25.62 ; 70.53,35.12 C14.2 ; C14.2 71.82,35.12 ; C14.2 71.82,31.94 ; C14.2 70.53,31.94 ; 46.98,31.74 C26.2 48.26,31.78 ; 37.07,29.05 C28.2 ; C28.2 37.07,30.26 ; C28.2 38.35,31.52 ; C28.2 37.07,31.48 ; F-.5 94.26,68.05 ; F-.5 92.46,67.67 ; F-.5 94.26,71.65 ; F-.5 90.66,71.65 ; F-.5 94.64,69.85 ; F-.5 90.66,68.05 ; F-.5 90.27,69.85 ; F-.5 92.46,72.04 ; 43.43,26.25 v1(43.43,28.19) 43.43,30.14 ; 97.26,78.25 F-.3 ; F-.3 96.87,76.45 ; F-.3 97.26,74.65 ; F-.3 99.06,78.64 ; F-.3 99.06,74.27 ; 46.1,31.2 U3.4 44.55,30.74 ; F+.4 99.06,49.94 ; F+.4 97.26,49.55 ; F+.4 96.87,47.75 ; F+.4 99.06,45.57 ; F+.4 97.26,45.95 ; C13.1 72.03,37.21 ; C13.1 70.78,35.93 ; C13.1 71.99,38.49 ; C13.1 71.99,35.93
  BOTTOM w0.203: v1(43.94,28.7) v1(43.43,28.19) ; v1(43.43,28.19) v1(42.93,27.69) ; v1(43.43,28.19) v1(42.93,28.7) ; C9.1 64.17,27.58 C12.2
  BOTTOM w0.508: C15.2 87.84,12.38 ; C15.2 86.55,12.38 ; C15.2 85.26,12.38 ; C15.2 87.99,13.97 ; C15.2 85.26,15.56 ; C15.2 87.84,15.56 ; S-.2 94.26,34.56 ; S-.2 92.46,34.95 ; S-.2 94.64,32.76 ; S-.2 90.66,30.96 ; S-.2 92.46,30.58 ; S-.2 90.66,34.56 ; S-.2 94.26,30.96 ; S-.2 90.27,32.76 ; 57.71,38.93 C16.2 ; C16.2 60.43,37.34 ; C16.2 58.99,38.93 ; C16.2 60.28,38.93 ; C16.2 58.99,35.75 ; C16.2 60.28,35.75 ; F+.5 94.26,45.95 ; F+.5 92.46,49.94 ; F+.5 90.66,45.95 ; F+.5 90.27,47.75 ; F+.5 92.46,45.57 ; F+.5 94.64,47.75 ; F+.5 90.66,49.55 ; F+.5 94.26,49.55 ; 90.27,12.44 S+.2 ; S+.2 92.46,10.26 ; S+.2 94.64,12.44 ; S+.2 94.26,10.64 ; S+.2 90.66,10.64 ; S+.2 92.46,14.63 ; S+.2 90.66,14.24 ; S+.2 94.26,14.24 ; 90.27,26.16 S-.5 ; S-.5 90.66,27.96 ; S-.5 94.26,24.36 ; S-.5 94.64,26.16 ; S-.5 94.26,27.96 ; S-.5 92.46,28.35 ; S-.5 92.46,23.98 ; S-.5 90.66,24.36 ; 90.66,68.05 F-.5 ; F-.5 92.46,72.04 ; F-.5 94.26,68.05 ; F-.5 94.26,71.65 ; F-.5 92.46,67.67 ; F-.5 94.64,69.85 ; F-.5 90.27,69.85 ; F-.5 90.66,71.65 ; 66.74,21.54 C7.2 ; C7.2 66.74,20.26 ; C7.2 69.91,20.26 ; C7.2 69.91,21.54 ; C7.2 68.33,21.69 ; 64.2,25.97 C12.2 ; C12.2 65.48,29.15 ; C12.2 62.91,25.97 ; C12.2 65.48,25.97 ; 99.06,3.66 S+.4 ; S+.4 96.87,5.84 ; S+.4 97.26,4.04 ; S+.4 97.26,7.64 ; S+.4 99.06,8.03 ; 97.26,74.65 F-.3 ; F-.3 99.06,78.64 ; F-.3 96.87,76.45 ; F-.3 97.26,78.25 ; F-.3 99.06,74.27 ; 99.06,23.98 S-.4 ; S-.4 99.06,28.35 ; S-.4 97.26,24.36 ; S-.4 97.26,27.96 ; S-.4 96.87,26.16 ; F+.3 99.06,56.54 ; F+.3 96.87,54.35 ; F+.3 99.06,52.17 ; F+.3 97.26,56.15 ; F+.3 97.26,52.55 ; S+.5 94.26,7.64 ; S+.5 90.66,4.04 ; S+.5 90.27,5.84 ; S+.5 90.66,7.64 ; S+.5 92.46,3.66 ; S+.5 92.46,8.03 ; S+.5 94.64,5.84 ; S+.5 94.26,4.04 ; R34.1 60.15,32.89 ; R34.1 59.05,34.05 ; R34.1 60.04,34.05 ; 97.26,14.24 S+.3 ; S+.3 99.06,10.26 ; S+.3 96.87,12.44 ; S+.3 99.06,14.63 ; S+.3 97.26,10.64 ; C9.1 65.39,28.31 ; C9.1 64.17,30.87 ; C9.1 65.43,29.59 ; C9.1 65.39,30.87 ; 64.67,34.42 C17.1 ; C17.1 67.39,36.01 ; C17.1 64.82,36.01 ; C17.1 64.82,32.83 ; C17.1 66.1,36.01 ; C17.1 66.1,32.83 ; C17.1 67.39,32.83 ; R22.2 91.59,60.11 ; R22.2 90.48,63.08 ; R22.2 90.48,60.11 ; R22.2 91.79,61.59 ; R22.2 91.59,63.08 ; R22.2 89.38,63.08 ; R22.2 89.38,60.11 ; F+.2 92.46,56.54 ; F+.2 94.26,56.15 ; F+.2 90.66,56.15 ; F+.2 90.27,54.35 ; F+.2 90.66,52.55 ; F+.2 94.26,52.55 ; F+.2 92.46,52.17 ; F+.2 94.64,54.35 ; 96.87,47.75 F+.4 ; F+.4 97.26,49.55 ; F+.4 97.26,45.95 ; F+.4 99.06,49.94 ; F+.4 99.06,45.57 ; 96.87,69.85 F-.4 ; F-.4 97.26,68.05 ; F-.4 99.06,72.04 ; F-.4 99.06,67.67 ; F-.4 97.26,71.65 ; 97.26,30.96 S-.3 ; S-.3 99.06,30.58 ; S-.3 97.26,34.56 ; S-.3 99.06,34.95 ; S-.3 96.87,32.76 ; F-.2 94.26,74.65 ; F-.2 94.64,76.45 ; F-.2 90.66,74.65 ; F-.2 94.26,78.25 ; F-.2 90.66,78.25 ; F-.2 92.46,78.64 ; F-.2 92.46,74.27 ; F-.2 90.27,76.45 ; 55.08,31.48 C10.1 56.3,31.48
  vias: v1(25.65,23.62) v1(25.8,29.45) v1(25.78,20.32) v1(29.46,34.04) v1(30.88,29.45) v1(30.86,23.62) v1(30.88,19.29) v1(33.27,34.04) v1(35.96,19.29) v1(36.2,26.54) v1(36.58,34.04) v1(36.83,30.32) v1(38.33,31.78) v1(40.13,34.04) v1(41.04,19.29) v1(43.5,33.97) v1(43.81,31.75) v1(43.94,27.69) v1(46.12,19.29) v1(46.67,33.02) v1(49.85,22.86) v1(49.78,19.43) v1(50.92,32.7) v1(53.34,30.8) v1(53.98,22.54) v1(54.29,27.3) v1(54.29,19.37) v1(54.29,14.6) v1(54.61,38.42) v1(56.54,17.91) v1(56.9,20.12) v1(57.47,28.26) v1(61.67,33.79) v1(64.21,36.33) v1(64.21,33.79) v1(66.67,32) v1(67.31,28.26) v1(69.22,31.43) v1(70.48,28.26) v1(70.74,43.31) v1(70.87,38.99) v1(70.87,37.21) v1(71.81,31.7) v1(72.07,40) v1(72.07,35.56) v1(73.15,67.44) v1(73.41,61.72) v1(73.41,56.64) v1(73.41,51.56) v1(73.41,46.48) v1(74.3,28.26) v1(74.37,26.17) v1(75.56,35.56) v1(75.56,33.66) v1(75.62,17.07) v1(77.15,38.42) v1(77.15,30.16) v1(77.34,76.96) v1(77.34,71.88) v1(77.35,7.07) v1(77.34,4.5) v1(77.34,1.14) v1(78.11,47.94) v1(78.74,33.02) v1(79.38,36.83) v1(80.26,22.35) v1(80.52,28.19) v1(80.64,41.91) v1(81.93,31.23) v1(81.92,4.57) v1(81.94,1.14) v1(83.19,78.36) v1(83.19,34.61) v1(85.09,31.75) v1(85.41,26.99) v1(85.72,34.61) v1(86.23,67.13) v1(86.59,71.78) v1(86.61,13.97) v1(87.07,1.14) v1(87.43,79.55) v1(87.95,33.97) v1(88.39,11.05) v1(88.9,5.08) v1(89.53,37.15) v1(89.64,1.14) v1(90.45,71.93) v1(92.23,1.14) v1(92.39,59.37) v1(92.46,79.63) v1(92.46,66.8) v1(92.46,61.98) v1(92.46,57.28) v1(92.46,45.08) v1(92.46,35.94) v1(92.46,29.46) v1(93.34,42.86) v1(93.34,40.51) v1(93.34,18.16) v1(93.42,23.77) v1(95.55,63.98) v1(95.78,54.36) v1(95.89,36.51) v1(96.65,18.16) v1(96.84,42.55) v1(97.26,1.14) v1(98.42,40) v1(98.93,16.26) v1(99.06,79.63) v1(99.06,73.15) v1(99.06,66.8) v1(99.06,61.98) v1(99.06,57.28) v1(99.06,45.08) v1(99.06,35.94) v1(99.06,29.46) v1(99.06,22.99) v1(100.46,1.14)
D3.3V: length 125.4
  TOP w0.203: R11.2 v1(55.24,40.06) ; v1(56.64,41.15) 58.17,39.62 58.17,38.35 58.46,38.06 U1.26 ; U1.6 69.09,35.56 69.98,36.45 69.98,41.4 v1(69.47,41.91)
  TOP w0.762: v1(22.61,35.94) 17.27,35.94 16.51,36.7 16.51,50.8 17.78,52.07 17.78,57.15 19.9,59.27 R1.1 R42.1
  BOTTOM w0.203: 64.52,41.53 C32.2 ; 64.52,41.53 64.64,41.4 68.96,41.4 v1(69.47,41.91) ; 64.52,41.53 64.26,41.78 57.28,41.78 v1(56.64,41.15) ; v1(55.24,40.06) 55.24,41.15 ; 21.53,19.56 21.34,19.56
  BOTTOM w0.762: v1(56.64,41.15) 54.8,41.15 49.59,35.94 v1(22.61,35.94) 22.61,20.83 21.34,19.56 P3.4
D5V: length 9.2
  TOP w0.508: 23.5,25.27 23.41,25.19 R40.2
  TOP w0.762: 23.5,25.27 23.5,16.89 P3.5
DGND: length 128.3
  TOP w0.203: C21.2 v1(68.33,46.99) C22.2 ; 66.67,39.37 66.57,39.26 U1.13 ; 66.8,40.13 66.8,40.39 v1(67.06,40.39) ; U1.23 60.49,39.84 60.25,40.08 59.64,40.08 59.29,39.73 ; 59.29,39.73 v1(58.53,40.49) ; 59.29,39.73 U1.25
  TOP w0.508: 13.46,57.38 RESET.3 ; RESET.3 15.01,60.09 ; RESET.3 13.46,60.22 ; RESET.3 15.01,57.51 ; RESET.3 15.01,58.8 ; RESET.3 11.91,57.51 ; RESET.3 11.91,58.8 ; RESET.3 11.91,60.09 ; P1.2 47.18,55.98 ; P1.2 45.81,56.19 ; P1.2 44.45,55.98 ; P1.2 47.18,53.24 ; P1.2 47.39,54.61 ; P1.2 44.45,53.24 ; C21.2 67.45,48.5 ; C21.2 66.25,48.5 ; C21.2 68.64,48.5 ; 4.04,60.09 RESET.4 ; RESET.4 4.04,57.51 ; RESET.4 5.59,57.38 ; RESET.4 7.14,58.8 ; RESET.4 7.14,57.51 ; RESET.4 4.04,58.8 ; RESET.4 5.59,60.22 ; RESET.4 7.14,60.09 ; 10.71,63.29 P5.7 ; P5.7 12.19,66.51 ; P5.7 13.68,66.25 ; P5.7 10.71,66.25 ; P5.7 13.68,63.29 ; P5.7 12.19,63.03 ; 22.51,32.65 R41.2 ; R41.2 22.35,31.37 ; R41.2 23.53,30.09 ; R41.2 23.53,32.65 ; R41.2 22.51,30.09 ; Y1.4 66.21,53.77 ; Y1.4 67.7,53.66 ; Y1.4 64.72,52.38 ; Y1.4 64.72,53.66 ; Y1.4 64.72,51.11 ; 68.01,48.5 C22.2 69.2,48.5 ; 68.41,49.1 Y1.2 ; Y1.2 69.9,50.49 ; Y1.2 69.9,49.21 ; Y1.2 66.92,49.21
  BOTTOM w0.508: C20.2 62.87,43.84 ; C20.2 61.58,42.58 ; C20.2 61.58,43.8 ; P5.7 13.68,66.25 ; P5.7 13.68,63.29 ; P5.7 12.19,66.51 ; P5.7 12.19,63.03 ; P5.7 10.71,66.25 ; P5.7 10.71,63.29 ; C32.1 65.8,42.13 ; C32.1 65.8,44.56 ; C32.1 65.8,43.35 ; C32.1 64.52,44.6 ; C32.1 63.23,44.56 ; 44.45,55.98 P1.2 ; P1.2 45.81,56.19 ; P1.2 45.81,53.03 ; P1.2 44.45,53.24 ; 55.36,42.71 C30.1 ; C30.1 57.93,42.71 ; C30.1 55.36,43.93 ; C30.1 57.93,43.93 ; C30.1 56.64,43.97
  vias: v1(1.2,61.27) v1(1.2,56.19) v1(1.2,51.11) v1(1.32,66.29) v1(1.27,18.67) v1(1.65,13.84) v1(4.06,56.26) v1(4.06,51.05) v1(5.73,66.35) v1(5.73,61.27) v1(5.71,18.54) v1(5.97,13.72) v1(7.37,50.67) v1(10.34,60.43) v1(10.29,18.67) v1(10.81,66.35) v1(10.79,13.72) v1(12.19,50.67) v1(13.59,18.67) v1(15.89,66.35) v1(16.16,53.14) v1(18.8,41.33) v1(20.97,66.35) v1(20.97,46.03) v1(21.21,34.29) v1(21.21,30.1) v1(25.08,57.47) v1(26.05,66.35) v1(27.94,46.23) v1(27.94,41.15) v1(31.13,66.35) v1(31.13,40.95) v1(36.21,66.35) v1(36.32,40.13) v1(41.29,66.35) v1(41.29,61.27) v1(41.66,40.26) v1(41.91,51.85) v1(46.37,66.35) v1(48.9,37.47) v1(51.45,66.35) v1(51.45,61.27) v1(56.53,66.35) v1(56.53,61.27) v1(56.77,48.39) v1(57.02,45.85) v1(61.61,66.35) v1(61.61,61.27) v1(61.61,56.19) v1(63.5,52.07) v1(65.23,45.26) v1(66.69,66.35) v1(66.69,61.27) v1(66.69,56.19) v1(66.93,44.07) v1(67.31,48.89) v1(69.57,44.17) v1(69.85,48.89)
A3: length 79.7
  TOP w0.203: U1.22 60.99,40.1 59.06,42.03 55.4,42.03 R11.1 54.25,41.87 51.17,38.79 v1(46.25,38.79) ; P2.4 44.2,17.65 40.56,21.29 26.49,21.29 24.41,23.37 24.41,38.38 24.83,38.8 v1(24.83,39.94) 24.89,39.88 v1(29.16,39.88)
  BOTTOM w0.203: v1(29.16,39.88) 29.21,39.88 30.35,38.73 46.05,38.73 46.1,38.79 v1(46.25,38.79)
AFE2: length 1.6
  TOP w0.203: U1.35 58.46,33.56 v1(57.91,33.02)
AIN1: length 56.1
  TOP w0.203: U1.38 60.49,31.79 60.07,31.37 59.21,31.37 58.42,30.58 58.42,29.21 58.67,28.96 C8.1 61.43,27.09 61.94,26.58 63.72,26.58 66.93,29.78 72.33,29.78 73.66,31.11 73.66,36.51 76.83,39.69 76.83,48.26 79.69,51.12 81.92,51.12 AIN1.1
  BOTTOM w0.762: R26.2 AIN1.1
AIN2: length 16.6
  TOP w0.203: 56.22,24.45 56.22,22.29 58.38,20.13 R20.2 ; 56.22,24.45 56.22,28.92 59.67,32.36 U1.37 ; 56.22,24.45 R35.2
AIN3: length 21
  TOP w0.203: R17.2 57.29,18.48 55.24,20.52 v1(55.24,26.04) 55.24,28.7 58.74,32.19 58.74,32.67 59.13,33.06 U1.36
  BOTTOM w0.203: v1(57.89,26.04) v1(55.24,26.04)
AMPIN_N: length 35.7
  TOP w0.203: U2.6 82.27,23.19 81.84,23.62 80.25,23.62 80.12,23.49 JP1.2 ; v1(66.36,27.03) 66.36,26.99 65.09,25.72 61.28,25.72 60.96,26.04 R37.1 59.59,26.14 ; A2.10 v1(69.6,23.57)
  BOTTOM w0.203: JP1.2 77.99,23.49 77.86,23.62 75.12,23.62 71.72,27.03 v1(66.36,27.03) 66.36,24.4 66.2,24.24 66.2,23.22 66.71,22.71 68.73,22.71 v1(69.6,23.57)
AMPIN_P: length 42.1
  TOP w0.203: R35.1 65.41,24.45 67.63,26.67 72.64,26.67 77.44,21.87 77.44,19.3 ; 77.44,19.3 73.41,19.3 73.03,18.92 71.09,18.92 69.6,17.42 A2.5 ; 77.44,19.3 77.44,16.54 JP2.2 80.12,14.92 80.19,14.99 81.89,14.99 82.27,15.36 U2.9
CE0: length 30
  TOP w0.203: U1.47 64.99,31.91 65.69,31.21 65.69,30.16 ; 65.69,30.16 64.48,28.96 C8.2 ; 65.69,30.16 72.07,30.16 73.03,31.11 73.03,37.78 75.56,40.32 CE0.1
  TOP w0.762: CE0.1 R25.2
D2: length 27
  BOTTOM w0.203: P6.3 52.58,56.39 52.58,45.59 JP7.1
D3: length 26.4
  TOP w0.203: JP8.1 52.01,45.72 R38.1
  BOTTOM w0.203: P6.4 51.31,55.12 51.31,47.5 JP8.1
D4: length 28.4
  TOP w0.203: v1(39.88,52.7) v1(49.53,52.7) ; JP9.1 R39.1
  BOTTOM w0.203: v1(49.53,52.7) JP9.1 ; v1(39.88,52.7) 39.88,64.01 P6.5
D10: length 59.6
  TOP w0.203: U1.15 64.49,42.83 56.32,50.99 41.56,50.99 41.43,51.12 v1(37.43,51.12) ; P5.3 24.64,62.48 34.29,62.48 v1(37.43,59.34)
  BOTTOM w0.203: v1(37.43,51.12) v1(37.43,59.34)
D11: length 67.3
  TOP w0.203: v1(30.8,50.17) v1(21.59,50.17) ; v1(30.8,44.45) 51.05,44.45 51.44,44.83 60.71,44.83 63.49,42.05 U1.17
  BOTTOM w0.203: v1(21.59,50.17) 19.51,52.25 19.51,63.58 19.81,63.88 P5.4 ; v1(30.8,44.45) v1(30.8,50.17)
D12: length 73.6
  TOP w0.203: v1(29.21,42.86) 30.26,41.81 31.48,41.81 32.01,41.27 45.08,41.27 45.72,41.91 45.72,43.5 46.04,43.81 50.96,43.81 51.59,44.45 60.2,44.45 62.99,41.66 U1.18 ; v1(29.21,48.26) v1(18.41,48.26)
  BOTTOM w0.203: P5.5 17.27,63.86 17.02,63.6 17.02,49.66 v1(18.41,48.26) ; v1(29.21,42.86) v1(29.21,48.26)
D13: length 68.4
  TOP w0.203: v1(35.24,46.96) 35.27,46.99 59.44,46.99 63.99,42.44 U1.16 ; P5.6 18.29,61.21 32.45,61.21 v1(35.24,58.42)
  BOTTOM w0.203: v1(35.24,46.96) v1(35.24,58.42)
EXC_P: length 27.8
  TOP w0.635: RCAL.4 v1(82.27,49.57)
  TOP w0.762: P7.2 81.53,67.56 78.74,64.77 Q2.2 78.74,57.47 80.64,55.56 Q1.3
  BOTTOM w0.635: v1(82.27,46.86) v1(82.27,49.57) 82.19,49.57 80.64,51.12 Q1.3
GPIO0: length 20.4
  TOP w0.203: JP7.2 48.26,41.27 50.48,41.27 53.28,44.07 59.82,44.07 62.49,41.4 U1.19
GPIO1: length 37.5
  TOP w0.203: U1.20 61.99,41.14 59.63,43.5 54.17,43.5 50.99,40.32 48.3,40.32 v1(48.25,40.28)
  BOTTOM w0.203: P8.2 47.62,55.97 47.62,51.12 48.26,50.48 48.26,46.99 JP8.2 48.25,44.46 v1(48.25,40.28)
GPIO2: length 117.7
  TOP w0.203: U2.14 v1(86.49,16.38) 86.49,16.16 86.51,16.13 86.51,15.6 87.88,14.22 87.88,12.7 87,11.81 80.77,11.81 80.14,11.18 78.24,11.18 77.7,11.71 77.7,13 v1(76.4,14.3) ; U2.1 85.52,23.03 85.88,23.39 v1(86.43,23.39) ; v1(66.24,13.57) 66.15,13.57 65.79,13.21 53.78,13.21 51.12,15.88 51.12,27.94 51.44,28.26 51.44,30.74 52.39,31.69 v1(52.39,33.97) ; U1.21 61.49,40.87 59.5,42.86 54.29,42.86 50.8,39.37 47.83,39.37 v1(46.51,40.69) 45.09,39.27 v1(45.09,33.97)
  BOTTOM w0.203: v1(76.4,14.3) 75.77,13.67 69.69,13.67 69.13,13.1 67.37,13.1 66.89,13.57 v1(66.24,13.57) ; v1(86.49,16.38) 85.91,16.96 85.91,19.11 86.11,19.3 ; v1(86.43,23.39) 86.43,19.63 86.11,19.3 ; v1(52.39,33.97) v1(45.09,33.97) ; v1(46.51,40.69) 45.72,41.48 45.72,47.5 46.99,48.77 JP9.2 ; 86.11,19.3 R33.2
LPF0: length 97.4
  TOP w0.203: U4.7 86.97,7.74 87.22,7.49 ; 87.22,7.49 86.97,7.24 U4.6 ; 87.22,7.49 87.72,7.49 88.52,8.29 v1(88.52,9.14) ; v1(80.26,19.3) 93.73,19.3 94.93,18.1 94.93,11.32 92.76,9.14 v1(91.06,9.14) ; U1.40 61.49,31.41 61.14,31.06 v1(61.14,30.45) ; R5.1 85.09,38.58 v1(84.45,37.94) 83.5,38.9 R4.2 ; R3.1 90.87,20.13 v1(90.81,20.07)
  TOP w0.762: R2.2 R3.1
  BOTTOM w0.203: R18.2 70.74,19.3 ; 70.74,19.3 65.88,19.3 59.56,25.62 v1(59.56,28.07) JP3.1 59.76,28.39 60.96,29.59 61.14,29.59 ; 70.74,19.3 v1(80.26,19.3) ; 70.74,19.3 70.74,19.9 R19.1 ; v1(84.45,37.94) 84.45,34.29 89.61,29.13 89.61,23.7 90.81,22.5 v1(90.81,20.07) ; 61.14,29.59 C9.2 ; 61.14,29.59 v1(61.14,30.45) ; v1(88.52,9.14) v1(91.06,9.14)
PRE1A: length 83.6
  TOP w0.203: C37.2 82.6,41.96 81.6,40.96 R4.1 81.6,39 81.65,38.95 v1(81.65,38.1) R6.1 ; U4.2 84.33,5.34 83.57,4.57 v1(83.57,4.44)
  BOTTOM w0.203: v1(81.65,38.1) 84.92,41.37 95.38,41.37 100.86,35.89 100.86,3.33 100.2,2.67 87.38,2.67 85.47,0.76 84.2,0.76 83.57,1.4 v1(83.57,4.44)
PRE1B: length 79.4
  TOP w0.203: v1(82.68,10.36) 83.48,10.36 84.33,9.51 U4.11 ; v1(87.63,3.68) 88.24,3.08 99.27,3.08 100.86,4.67 100.86,35.66 97.47,39.05 90.17,39.05 89.23,39.99 87.83,39.99 87.82,40 R5.2 ; R7.1 87,38.92 86.99,38.93 R5.2 ; R5.2 86.99,41.65 C38.2
  BOTTOM w0.203: v1(87.63,3.68) 87.63,9.91 86.36,11.18 83.49,11.18 v1(82.68,10.36)
PRE2A: length 22.7
  TOP w0.203: C39.2 91.76,16.51 R2.1 91.63,16.51 89.93,16.51 R8.1 89.9,16.27 89.43,15.8 89.43,8.28 v1(86.74,5.59) ; v1(84.84,4.44) 84.84,5.99 U4.3
  BOTTOM w0.203: SNS_P.1 v1(84.84,4.44) 85.6,4.44 v1(86.74,5.59)
PRE2B: length 25.9
  TOP w0.203: v1(84.84,10.29) 84.84,9 U4.10 ; R9.1 v1(89.79,22.1) 91.63,22.1 R3.2 93.46,22.03 SNS_N.1 95.68,21.16 95.83,21.01 C36.2 ; v1(89.41,18.16) 88.8,17.56 88.8,12.86 86.74,10.79 v1(86.74,9.14)
  BOTTOM w0.203: v1(89.41,18.16) 89.79,18.54 v1(89.79,22.1) ; v1(86.74,9.14) 85.6,10.29 v1(84.84,10.29)
PRE3A: length 34.4
  TOP w0.203: v1(68.71,14.43) 68.7,14.42 C5.2 ; U4.4 85.33,5.47 85.85,4.95 85.85,3.94 85.47,3.56 81.15,3.56 79.25,5.46 79.25,9.52 77.32,11.46 77.32,12.39 77.29,12.42 77.29,12.5 76.71,13.08 68.96,13.08 68.7,13.35 C5.2 ; C5.2 68.44,14.48 67.56,14.48 67.06,14.99 A2.3
  BOTTOM w0.203: v1(68.71,14.43) 68.71,14.99 69.66,15.94 R18.1
PRE3B: length 59.8
  TOP w0.203: C6.2 68.65,25.16 v1(67.06,23.57) A2.12 67.06,21.3 65.06,19.3 59.69,19.3 59.44,19.05 59.44,17.78 59.18,17.53 57.48,17.53 57.28,17.32 57.28,15.75 57.66,15.37 65.66,15.37 68.12,12.9 68.6,12.9 68.8,12.7 76.47,12.7 76.94,12.23 76.94,10.44 v1(78.23,9.14) ; U4.9 85.33,9.51 85.72,9.91 85.72,10.67 84.96,11.43 81.41,11.43 v1(80.14,10.16)
  BOTTOM w0.203: v1(80.14,10.16) 79.12,9.14 v1(78.23,9.14) ; R19.2 71.25,23.24 69.8,24.69 68.17,24.69 v1(67.06,23.57)
RESET_SHIELD: length 47.8
  TOP w0.203: P3.3 18.8,21.21 13.46,26.54 RESET.1
  TOP w0.508: RESET.2 RESET.1
RREF_N: length 26.8
  TOP w0.203: v1(87.88,20.32) 83.31,20.32 82.92,20.72 82.92,20.83 ; 82.92,20.83 80.25,20.83 80.12,20.95 JP1.3 ; 82.92,20.83 U2.5 ; v1(87.88,26.99) 87.88,28.96 87,29.84 R7.2
  BOTTOM w0.203: v1(87.88,20.32) v1(87.88,26.99)
RREF_P: length 32.1
  TOP w0.203: 82.92,17.78 82.84,17.86 80.52,17.86 80.12,17.46 JP2.3 ; 82.92,17.78 U2.10 ; 82.92,17.78 82.92,17.89 83.54,18.52 86.8,18.52 87.03,18.29 v1(87.88,18.29) ; v1(88.76,24.66) 86.36,27.06 86.36,28.57 81.6,33.34 R6.2
  BOTTOM w0.203: v1(87.88,18.29) 88.75,19.15 88.75,24.61 88.76,24.62 v1(88.76,24.66)
SENSE_N: length 13.5
  TOP w0.203: JP1.1 80.12,26.04 80.25,26.16 81.79,26.16 83.57,24.38 U2.4 83.57,21.08 83.82,20.83 86.72,20.83 87.63,21.74 87.63,22.03 R9.2
SENSE_P: length 14
  TOP w0.203: JP2.1 80.12,12.38 80.19,12.45 82.04,12.45 83.57,13.97 U2.11 83.57,17.45 84.1,17.98 86.56,17.98 87.63,16.92 87.63,16.71 87.83,16.51 87.98,16.51 R8.2
UNNAMED_2_AD5941_I433_AIN0: length 2.7
  TOP w0.203: U1.39 60.99,31.71 v1(59.56,30.29)
UNNAMED_2_AD5941_I433_AVDDREG: length 2.1
  TOP w0.203: U1.5 67.55,35.06 v1(68.07,34.54)
UNNAMED_2_AD5941_I433_DVDDREG1V: length 4.4
  TOP w0.203: U1.14 64.99,40.1 65.41,40.51 v1(65.53,40.51)
  BOTTOM w0.203: v1(65.53,40.51) 63.33,40.51 C20.1
UNNAMED_2_AD5941_I433_RCAL0: length 1.7
  TOP w0.203: v1(57.66,35.31) 58.22,35.31 58.46,35.06 U1.32
UNNAMED_2_AD5941_I433_RCAL1: length 3.2
  TOP w0.203: v1(56.39,34.92) 56.52,34.8 56.64,34.8 57.02,34.42 58.04,34.42 58.19,34.56 U1.33
UNNAMED_2_AD5941_I433_VBIAS0: length 3.3
  TOP w0.203: C13.2 68.53,36.56 U1.8
UNNAMED_2_AD5941_I433_VREF1V82: length 6.3
  TOP w0.203: v1(62.48,27.43) 62.48,28.02 62.2,28.3 62.2,29.69 62.61,30.1 63.12,30.1 63.5,30.48 63.5,31.37 62.99,31.88 U1.43
  BOTTOM w0.203: C12.1 62.36,27.56 v1(62.48,27.43)
UNNAMED_2_AD5941_I433_XTALI: length 18.4
  TOP w0.203: Y1.3 69.41,52.38 71,50.79 C22.1 71,46.84 68.58,44.41 68.58,39.8 66.84,38.06 U1.11
UNNAMED_2_AD5941_I433_XTALO: length 14.3
  TOP w0.203: U1.12 66.73,38.56 68.07,39.9 68.07,44.41 65.65,46.84 C21.1 65.65,49.02 66.21,49.58 Y1.1
UNNAMED_2_AD8694V2_I345_: length 6.6
  TOP w0.203: A2.2 65.79,17.78 65.34,18.22 R28.1 60.58,18.22 R27.1
UNNAMED_2_AD8694V2_I345_OUT: length 6.4
  TOP w0.203: A2.1 62.88,16.71 R28.2 58.67,16.32 R17.1
UNNAMED_2_AD8694V2_I349_: length 6.6
  TOP w0.203: A2.13 65.79,20.83 65.34,20.39 R29.1 60.58,20.39 R27.2
UNNAMED_2_AD8694V2_I349_OUT: length 6.4
  TOP w0.203: A2.14 62.88,21.89 R29.2 58.67,22.29 R20.1
UNNAMED_2_AD8694V2_I379_: length 6.4
  TOP w0.203: A2.6 70.87,17.45 71.64,18.22 R13.1 76.07,18.22 R12.1
UNNAMED_2_AD8694V2_I379_OUT: length 5.9
  TOP w0.203: R13.2 74.17,16.51 73.96,16.71 A2.7 72.14,15.11 71.25,14.22 C5.1
UNNAMED_2_AD8694V2_I385_: length 6.4
  TOP w0.203: R12.2 76.07,20.39 R14.1 71.66,20.39 70.87,21.18 A2.9
UNNAMED_2_AD8694V2_I385_OUT: length 6.2
  TOP w0.203: C6.1 70.45,25.13 72.12,23.46 72.12,23.13 72.14,23.11 A2.8 72.16,21.87 73.75,21.87 R14.2
UNNAMED_2_ADG1609_I415_A0: length 136.3
  TOP w0.203: v1(80.14,6.6) 80.78,7.24 U4.15
  BOTTOM w0.203: v1(80.14,6.6) 79.38,7.37 78.26,7.37 77,8.63 77,12.23 76.33,12.9 70.01,12.9 69.44,12.34 18.27,12.34 14.99,15.62 14.99,31.5 20.85,37.36 46.89,37.36 49.85,40.32 54.04,44.74 v1(54.04,45.85)
UNNAMED_2_ADG1609_I415_A1: length 138.9
  TOP w0.203: v1(80.14,8.38) 80.78,7.74 U4.14 ; R39.2 v1(53.98,48.89)
  BOTTOM w0.203: v1(80.14,8.38) 79.5,7.75 78.42,7.75 77.38,8.79 77.38,12.39 76.48,13.28 69.85,13.28 69.28,12.72 19.35,12.72 17.53,14.54 17.53,17.65 15.62,19.56 15.62,31.24 21.34,36.96 47.12,36.96 54.99,44.83 54.99,48.51 54.61,48.89 v1(53.98,48.89)
UNNAMED_2_ADM7155_I224_BYP: length 2.2
  TOP w0.203: C26.1 48.17,28.83 U3.3
UNNAMED_2_ADM7155_I224_EN: length 2.7
  TOP w0.203: 40.77,27.56 39.24,27.56 38.54,26.86 R10.2
UNNAMED_2_ADM7155_I224_REF: length 5.4
  TOP w0.203: C28.1 39.43,28.66 39.61,28.84 ; R15.1 39.63,31.08 39.61,31.05 39.61,28.84 ; 39.61,28.84 39.61,28.83 40.77,28.83
UNNAMED_2_ADM7155_I224_REFSENSE: length 2.7
  TOP w0.203: 40.77,30.1 40.77,31.62 R15.2 R16.1
UNNAMED_2_ADM7155_I224_VREG: length 2
  TOP w0.203: U3.1 46.27,26.12 C27.1
UNNAMED_2_CAP_I316_N1: length 10.4
  TOP w0.635: C37.1 80.06,43.76 EXC_P.1 79.24,44.58 79.24,47.81 79.69,48.26 RCAL.5
UNNAMED_2_CAP_I317_N1: length 10
  TOP w0.635: C38.1 89.48,43.76 TP1.1 89.98,44.26 89.98,47.81 89.53,48.26 RCAL.2
UNNAMED_2_CAP_I357_N1: length 7.4
  TOP w0.203: S+.1 95.76,16.44 C39.1
UNNAMED_2_CAP_I362_N1: length 7.2
  TOP w0.203: C36.1 97.16,24.13 95.76,25.53 S-.1
UNNAMED_2_CN2P_I372_N1: length 18.4
  TOP w0.762: R32.1 88.32,73.1 TP3.1 ; TP3.1 84.56,76.96 P7.1 ; TP3.1 F-.1 95.69,73.09
UNNAMED_2_CN2P_I422_N1: length 16.5
  TOP w0.203: GP1.C 30.03,53.97 35.56,53.97 39.37,57.78 P8.1
UNNAMED_2_CN2P_I430_N1: length 25.9
  TOP w0.203: PWR.C 20.95,53.34 22.23,52.07 36.2,52.07 38.73,54.61 P1.1
UNNAMED_2_CN3P_I243_N1: length 5.1
  TOP w0.203: JP7.3 43.18,42.55 42.55,43.18 P4.1
UNNAMED_2_CN3P_I243_N2: length 4.8
  TOP w0.203: P4.2 JP8.3
UNNAMED_2_CN3P_I243_N3: length 5.1
  TOP w0.203: P4.3 43.81,48.26 JP9.3
UNNAMED_2_CNBNC5P_I321_CNTR: length 11.9
  TOP w0.635: F+.1 91.38,51.05 89.98,49.66 v1(87.27,49.66)
  BOTTOM w0.635: v1(87.27,46.86) v1(87.27,49.66)
UNNAMED_2_DIOLED_I421_P: length 1.9
  TOP w0.203: PWR.A R1.2
UNNAMED_2_DIOLED_I424_P: length 1.9
  TOP w0.203: GP1.A R42.2
UNNAMED_2_RES_I303_N1: length 5.5
  TOP w0.635: R25.1 75.56,50.48 Q1.2
UNNAMED_2_RES_I307_N1: length 5.7
  BOTTOM w0.762: R26.1 84.78,59.37 R21.1 Q2.3
UNNAMED_2_RES_I309_N2: length 1.9
  BOTTOM w0.762: R22.1 R21.2
UNNAMED_2_TRAN2N3904_I306_E: length 8.8
  TOP w0.762: Q1.1 75.56,55.25 76.2,55.88 Q2.1
VBIAS_CAP: length 8.5
  TOP w0.203: 54.36,32.42 v1(54.36,33.02) ; v1(54.74,35.81) 56.9,35.81 57.28,36.2 58.04,36.2 58.67,35.56 U1.31
  BOTTOM w0.203: v1(54.36,33.02) 54.36,35.43 v1(54.74,35.81)
VREF_2V5: length 4.2
  TOP w0.203: C14.1 67.82,33.53 66.78,34.56 U1.4
VZERO0: length 3.8
  TOP w0.203: U1.9 67.26,37.06 69.09,38.89 v1(69.09,38.99)

## Copper pours and planes (outline as drawn; the poured copper is in the pictures)
AGND on TOP: 61.21,37.08 60.45,37.85 58.17,37.85 57.91,38.1 57.91,39.12 56.9,40.13 53.34,40.13 48.77,35.56 29.77,35.56 26.11,39.22 25.63,39.22 24.38,37.97 24.38,18.8 25.15,18.03 50.8,18.03 51.05,17.78 51.05,12.19 76.89,12.19 76.89,0.63 100.94,0.63 100.94,80.64 76.91,80.64 76.91,67.87 72.64,67.87 72.64,46.23 70.1,43.69 70.1,40.39 69.85,40.13 69.34,40.13 66.29,37.08
AGND on BOTTOM: 100.94,80.64 76.91,80.64 76.91,67.87 72.64,67.87 72.64,46.23 70.1,43.69 70.1,40.39 69.85,40.13 69.83,40.13 68.4,38.73 62.55,38.73 61.91,39.37 56.39,39.37 55.63,40.13 53.34,40.13 48.77,35.56 28.19,35.56 24.38,31.75 24.38,18.8 25.15,18.03 50.8,18.03 51.05,17.78 51.05,12.19 76.89,12.19 76.89,0.66 100.94,0.66 ; 1 cut-out
DGND on TOP: 0.64,67.94 0.64,12.19 50.55,12.19 50.55,17.27 50.29,17.53 24.89,17.53 23.88,18.54 23.88,32 27.94,36.07 48.77,36.07 53.34,40.64 57.15,40.64 58.42,39.37 58.42,38.61 58.67,38.35 60.71,38.35 61.47,37.59 65.79,37.59 68.83,40.64 69.34,40.64 69.6,40.89 69.6,43.94 72.14,46.48 72.14,67.94 ; 1 cut-out
DGND on BOTTOM: 50.55,12.19 0.64,12.19 0.64,67.94 72.14,67.94 72.14,46.48 69.6,43.94 69.6,40.89 69.34,40.64 68.83,40.64 65.79,37.59 61.47,37.59 60.71,38.35 57.58,38.35 55.3,40.64 53.34,40.64 48.77,36.07 27.94,36.07 23.88,32 23.88,18.54 24.89,17.53 50.29,17.53 50.55,17.27

Small or netless copper shapes (teardrops, artwork), in the pictures only: 38 on TOP, 23 on BOTTOM

## Text on the board
BOTTOM: SECONDARY SIDE
User.Comments: 1 | 3.    INSTALL QPC02SXGN-RC (M029337) ON JP7: | VIEWED FROM THE PRIMARY SIDE | PIN SHORT DETAIL | DEFAULT POS A: PIN 1 (D2) & PIN 2 (GPIO0) | SCALE: 1:2 | JP7 | VIEWED FROM THE SECONDARY SIDE
TOP: PRIMARY SIDE
Ref Des/Assembly Top: 1
Ref Des/Silkscreen Top: 1 | 08-047456 Rev-D | CN-0510 | EVAL-AD5941BATZ
PAGE_OUTLINE: B | C | D | AS PER ECR-078094 | PER ECR-084889 | PER ECR-089796 | 21MAY18 | 01MAR19 | 16AUG19 | P SHEAHAN | C.DENG
DIMENSION: DIA MAX; SEE NOTE 14 | (REF)
User.45: FIGURE | SIZE | 19.69 | 32.0 | 35.0 | 40.0 | 45.0 | 50.0 | 55.0 | 80.0 | PLATED | FINISHED HOLES IN MILS | ALL UNITS ARE IN MILS | QTY | 275 | 4 | 3 | 22 | 35 | 6 | 16 | TOLERANCE/NOTES
